# Altium PCB FSK-Modulator-V1.PcbDoc
Units mm, origin at the board's own origin, x right, y up, seen from the top; angles counter-clockwise.
Board outline 52 x 52 mm, 2 copper layers (Top Layer, Bottom Layer); 12 components, 21 nets, 81 pads, 7 vias.
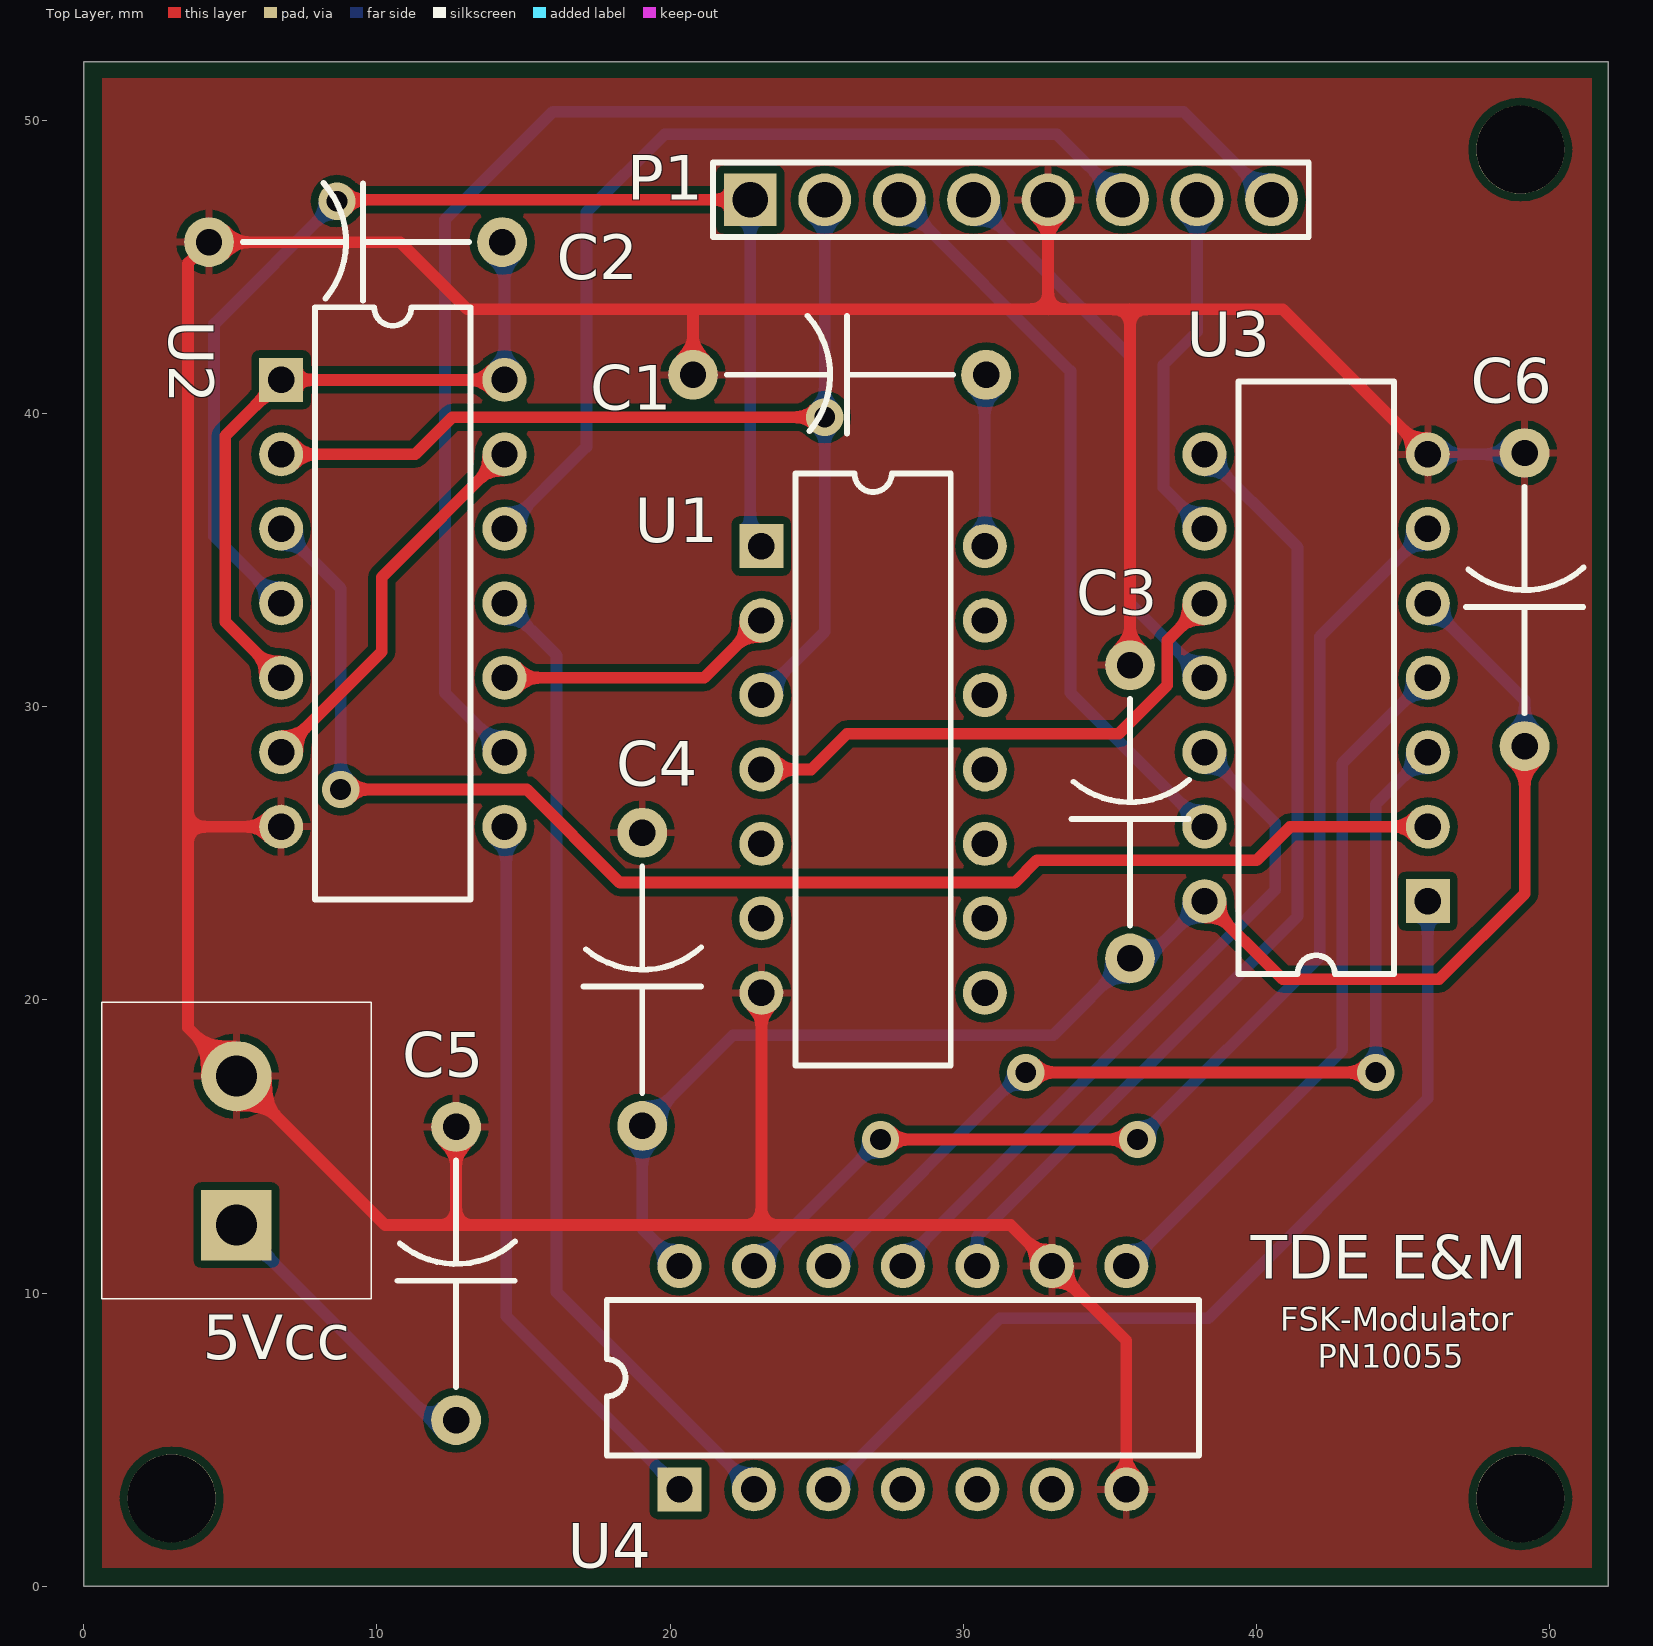
[diagram p0: Top Layer view]
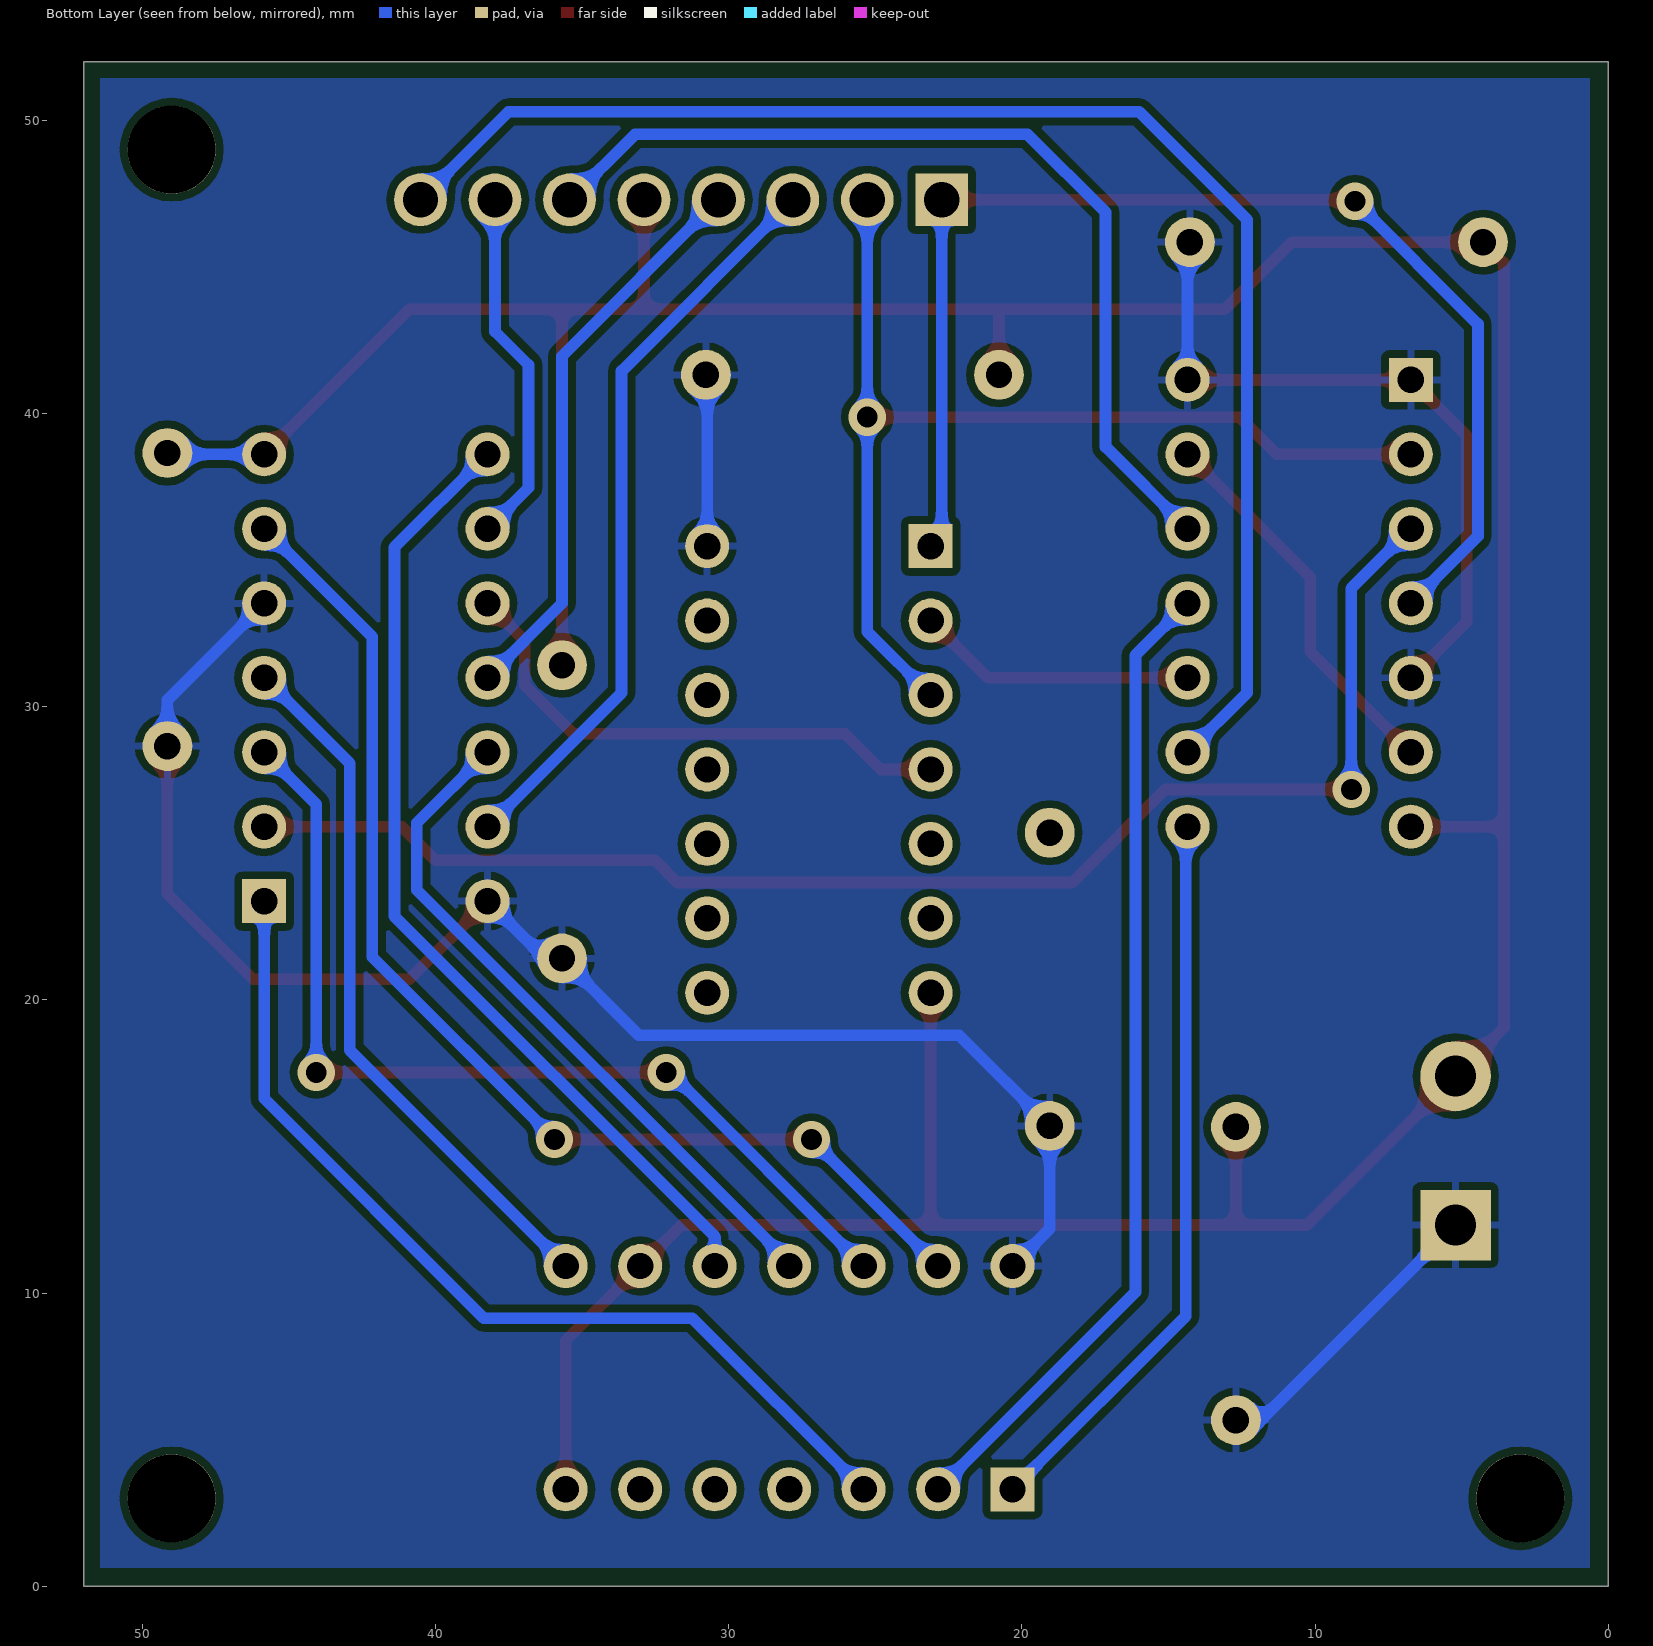
[diagram p1: Bottom Layer view, seen from below]
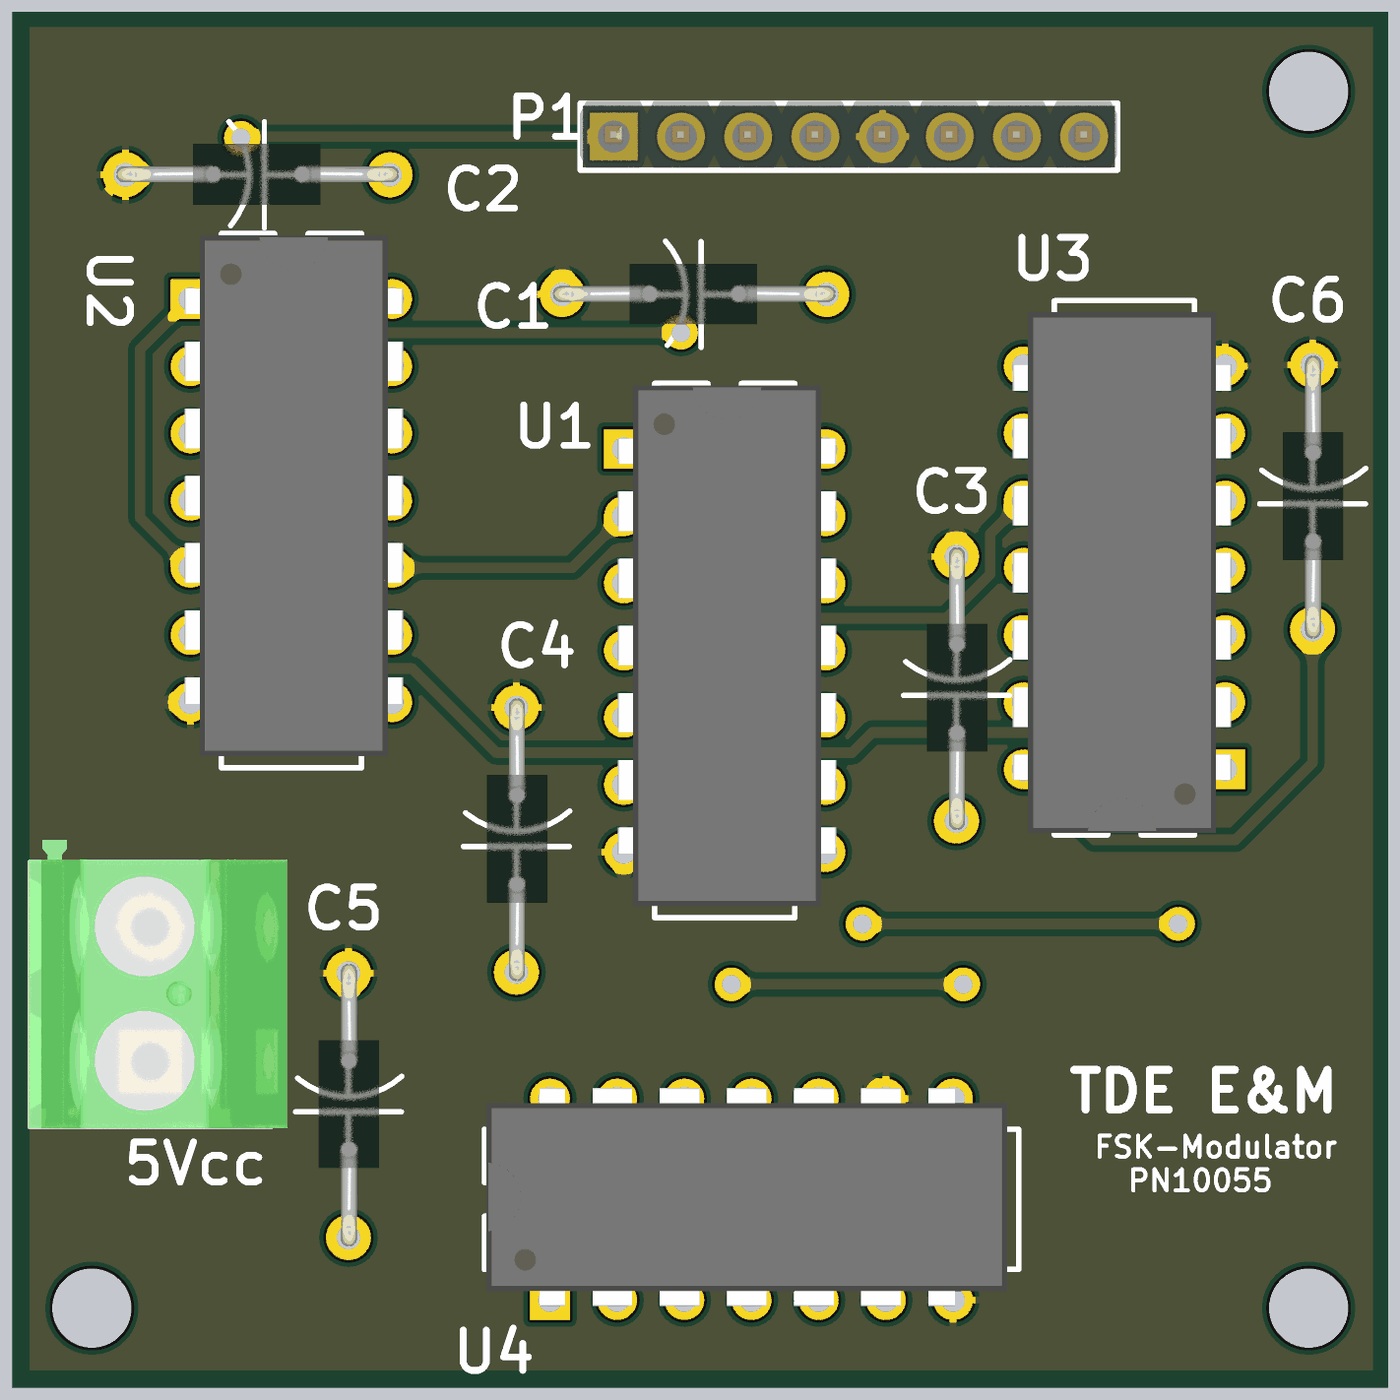
[diagram p2: 3D render of the assembled board from above, using the file's embedded part models]

## Layer stack, top to bottom
Top Solder: solder mask 0.0102, Solder Resist, Dk 3.5
Top Layer: signal copper 0.0356
Dielectric 1: dielectric 0.32, FR-4, Dk 4.8
Bottom Layer: signal copper 0.0356
Bottom Solder: solder mask 0.0102, Solder Resist, Dk 3.5

## Board outline
0,0 0,52 52,52 52,0

## Design rules (kind name [scope] priority, off if disabled: settings)
Clearance Polygons [InPolygon] p1: gap=0.254 ignorepadtopadclearanceinfootprint=FALSE except(0: Arc-Hole Track-Hole SMDPad-Hole THPad-Hole Via-Hole Fill-Hole Poly-Hole Region-Hole Text-Hole)
Clearance [All] p2: gap=0.15 ignorepadtopadclearanceinfootprint=FALSE except(0: Arc-Hole Track-Hole SMDPad-Hole THPad-Hole Via-Hole Fill-Hole Poly-Hole Region-Hole Text-Hole)
MinimumSolderMaskSliver [All] p1: minsoldermaskwidth=0.1
PolygonConnect [All] p1: connectstyle=Relief reliefconductorwidth=0.254 reliefentries=4 polygonreliefangle="90 Angle" airgapwidth=0.254
RoomDefinition FSK-Modulator-V1 [InComponentClass('FSK-Modulator-V1')] p1: confinementstyle=ConfineIn formatcopy=TRUE lockcomponents=FALSE outline -10.414,-7.239 65.659,-7.239 65.659,58.039 -10.414,58.039
RoutingVias [All] p1: holewidth=0.711 width=1.27 viastyle="Through Hole" minholewidth=0 minwidth=0 maxholewidth=0.711 maxwidth=1.27
SilkToSilkClearance [All] p1: silktosilkclearance=0
SilkToSolderMaskClearance [IsPad] p1: minsilkscreentomaskgap=0.1 clearancetoexposedcopper=TRUE
SolderMaskExpansion [All] p1: expansion=0.102
Width [All] p1: maxlimit=4 minlimit=0.254 preferedwidth=0.5
27 further rules are at their usual default settings.

## Components (designator, comment, footprint, x,y, rotation, side; value= is the part's Value field where it differs from the comment)
5Vcc "PHOENIX_1715721" Phoenix-2-5_08 5.207,14.859 r90 top
C1 "Capacitor-Dummy-THT" Dummy-10mm 25.781,41.322 r180 top value=100nF
C2 "Capacitor-Dummy-THT" Dummy-10mm 9.271,45.847 r180 top value=100nF
C3 "Capacitor-Dummy-THT" Dummy-10mm 35.687,26.416 r90 top value=100pF
C4 "Capacitor-Dummy-THT" Dummy-10mm 19.05,20.701 r90 top value=100pF
C5 "Capacitor-Dummy-THT" Dummy-10mm 12.7,10.668 r90 top value=100pF
C6 "Capacitor-Dummy-THT" Dummy-10mm 49.149,33.655 r90 top value=100pF
P1 "Plug_08_2.54" HDR1X8_2.54 31.623,47.291 r0 top
U1 "SN7404N" DIP-14 26.924,27.86 r270 top
U2 "SN74LS08N" DIP-14 10.541,33.528 r270 top
U3 "SN74LS08N" DIP-14 42.037,30.988 r90 top
U4 "SN7432N" DIP-14 27.94,7.112 r0 top

## Footprints (in the part's own frame and the unit in brackets; to place one, negate y for a bottom-side part, rotate by r counter-clockwise, add the part's x,y. Pads: shape width x height; smd on the part's side, far side on the other; paste and mask are expansions set on the pad)
DIP-14 [mm] "DIP; 14 Leads; Row Spacing 7.62 mm; Pitch 2.54 mm"
  rect 1.5x1.5 hole 0.9: 1(-7.62,-3.81)
  round 1.5 hole 0.9: 2(-5.08,-3.81) 3(-2.54,-3.81) 4(0,-3.81) 5(2.54,-3.81) 6(5.08,-3.81) 7(7.62,-3.81) 8(7.62,3.81) 9(5.08,3.81) 10(2.54,3.81) 11(0,3.81) 12(-2.54,3.81) 13(-5.08,3.81) 14(-7.62,3.81)
  silkscreen extent -10.1,-2.65 10.1,2.65, body extent -10.03,-4.04 9.66,4.22, height 4.4
Dummy-10mm [mm] "Dummy-10mm"
  round 1.7 hole 0.9: 1(-5,0) 2(5,0)
  silkscreen extent -3.88,-2.01 3.85,2, body extent -5.34,-1.16 5.35,1.13, height 7.83
HDR1X8_2.54 [mm] "Connector; Header; 8 Position"
  rect 1.8x1.8 hole 1.2: 1(-8.89,0)
  round 1.8 hole 1.2: 2(-6.35,0) 3(-3.81,0) 4(-1.27,0) 5(1.27,0) 6(3.81,0) 7(6.35,0) 8(8.89,0)
  silkscreen extent -10.16,-1.27 10.16,1.27, body extent -10.18,-1.19 10.14,1.35, height 7.27
Phoenix-2-5_08 [mm] "Phoenix, 1715721"
  rect 2.4x2.4 hole 1.4: 1(-2.54,0)
  round 2.4 hole 1.4: 2(2.54,0)
  silkscreen extent -5.06,-4.6 5.06,4.6, body extent -5.05,-5.19 5.85,4.61, height 14.2

## Part data
5Vcc: library part 2Pol_1715721, "Phoenix, 2 pol, 5.08mm, 22A, 715721", Deliverer PartNr=193-0564, Manufacturer=Phoenix, Manufacturer PartNr=1715721, Deliverer=RS, LatestRevisionDate=02.05.2014, LatestRevisionNote="Re-released for DXP Platform.", PackageDescription=Phoenix-2-5_08, Price=0.976/5, Publisher="Sebastian Kulik", TDE-PN=CON0008
C1 C2: Deliverer PartNr=721-5240, Manufacturer=-, Deliverer=RS, Manufacturer PartNr=-, PackageDescription=-, Part Description=Capacitor-Dummy-THT, Price=0.081/50, Published=08.12.2015, Publisher="Sebastian Kulik", TDE-PN=-
C3 C4 C5 C6: Deliverer PartNr=117-344, Manufacturer=-, Deliverer=RS, Manufacturer PartNr=-, PackageDescription=-, Part Description=Capacitor-Dummy-THT, Price=0.09/10, Published=08.12.2015, Publisher="Sebastian Kulik", TDE-PN=-
P1: "Plug, 08-Pin", Deliverer PartNr=61300811121, Manufacturer=WE, Deliverer=WE, LatestRevisionDate=11.11.2014, LatestRevisionNote="Re-released for DXP Platform.", Manufacturer PartNr=61300811121, Publisher="Sebastian Kulik", TDE-PN=CON0035
U1: "Hex Inverter TTL", Deliverer PartNr=305-529, Manufacturer=TI, Deliverer=RS, Manufacturer PartNr=SN7404N, PackageDescription=DIP14, Price=1, Published=24.11.2016, Publisher="Sebastian Kulik", TDE-PN=IC0086
U2 U3: "Quad AND, TTL", Deliverer PartNr=307-519, Manufacturer=TI, Deliverer=RS, Manufacturer PartNr=SN74LS08N, PackageDescription=DIP14, Price=0.56, Published=24.11.2016, Publisher="Sebastian Kulik", TDE-PN=IC0088
U4: "Quad NAND, TTL", Deliverer PartNr=304-093, Manufacturer=TI, Deliverer=RS, Manufacturer PartNr=SN7432N, PackageDescription=DIP14, Price=1.24, Published=24.11.2016, Publisher="Sebastian Kulik", TDE-PN=IC0087

## Free pads (board coordinates)
  round 3 hole 3 unplated: 2(3,3) 3(49,3) 4(49,49)

## Via types
v1: diameter 1.27, hole 0.711, Top Layer to Bottom Layer, 7 vias

## Nets (pads, with @x,y where several pads share a name; then routed paths per layer and width w, separated by ;. In a path a pad name is that pad's centre, name@x,y a point inside that pad or via, vN(x,y) a via of type N, cw(c..) or ccw(c..) an arc to the next point about the centre after c; other vN are vias at no path point)
NetP1_1: P1.1 U1.1 U2.4 | length 42.4
  Top Layer w0.4: v1@8.683,47.291 P1.1
  Bottom Layer w0.4: U2.4 4.445,35.814 4.445,43.053 v1(8.636,47.244) ; P1.1 22.733,35.861 U1.1
NetP1_2: P1.2 U1.3 U2.2 | length 36.9
  Top Layer w0.4: U2.2 11.303,38.608 12.573,39.878 v1(25.273,39.878)
  Bottom Layer w0.4: U1.3 25.273,32.559 25.273,38.608 P1.2
NetP1_3: P1.3 U3.13 | length 25.7
  Bottom Layer w0.4: P1.3 33.655,41.449 33.655,30.48 U3.13
NetP1_4: P1.4 U3.11 | length 19.6
  Bottom Layer w0.4: P1.4 35.687,41.957 35.687,33.528 U3.11
NetP1_6: P1.6 U2.12 | length 32.3
  Bottom Layer w0.4: U2.12 17.145,38.862 17.145,46.863 19.812,49.53 33.194,49.53 P1.6
NetP1_7: P1.7 U3.9 | length 12.3
  Bottom Layer w0.4: P1.7 37.973,42.799 36.83,41.656 36.83,37.465 U3.9
NetP1_8: P1.8 U2.9 | length 50
  Bottom Layer w0.4: U2.9 12.319,30.48 12.319,46.609 16.002,50.292 37.512,50.292 P1.8
NetU1_2: U1.2 U2.10 | length 9.6
  Top Layer w0.4: U2.10 21.162,30.988 U1.2
NetU1_4: U1.4 U3.10 | length 18.4
  Top Layer w0.4: U1.4 24.812,27.86 26.035,29.083 35.306,29.083 36.957,30.734 36.957,32.258 U3.10
NetU2_3: U2.3 U3.2 | length 48.9
  Top Layer w0.4: v1(8.763,27.178) 15.113,27.178 18.288,24.003 31.75,24.003 32.512,24.765 40.005,24.765 41.148,25.908 U3.2
  Bottom Layer w0.4: U2.3 8.763,34.036 v1(8.763,27.178)
NetU2_6: U2.6 U2.13 | length 13.3
  Top Layer w0.4: U2.6 10.16,31.877 10.16,34.417 U2.13
NetU2_8: U2.8 U4.1 | length 25.1
  Bottom Layer w0.4: U2.8 14.408,25.851 14.408,9.214 U4.1
NetU2_11: U2.11 U4.2 | length 33.8
  Bottom Layer w0.4: U2.11 16.129,31.75 16.129,10.033 U4.2
NetU3_1: U3.1 U4.3 | length 32.7
  Bottom Layer w0.4: U4.3 31.242,9.144 38.354,9.144 45.847,16.637 U3.1
NetU3_3: U3.3 U4.12 | length 33.1
  Top Layer w0.4: v1(32.131,17.526) v1(44.069,17.526)
  Bottom Layer w0.4: U4.12 32.004,17.526 v1(32.131,17.526) ; v1(44.069,17.526) 44.069,26.67 U3.3
NetU3_4: U3.4 U4.8 | length 24.3
  Bottom Layer w0.4: U4.8 42.926,18.288 42.926,28.067 U3.4
NetU3_6: U3.6 U4.13 | length 39.8
  Top Layer w0.4: v1(27.178,15.24) v1(35.941,15.24)
  Bottom Layer w0.4: U4.13 v1(27.178,15.24) ; v1(35.941,15.24) 42.164,21.463 42.164,32.385 U3.6
NetU3_8: U3.8 U4.10 | length 33.5
  Bottom Layer w0.4: U4.10 30.48,11.938 41.402,22.86 41.402,35.433 U3.8
NetU3_12: U3.12 U4.11 | length 23.8
  Bottom Layer w0.4: U4.11 27.94,11.049 40.64,23.749 40.64,26.035 U3.12
Vdd: 5Vcc.1 C1.1 C2.1 C3.1 C4.1 C5.1 C6.1 U1.14 U2.1 U2.5 U2.14 U3.5 U3.14 U4.14 | length 92.4
  Top Layer w0.4: U2.5 4.826,32.893 4.826,39.243 U2.1 U2.14 ; U3.14 40.894,20.701 46.228,20.701 49.149,23.622 C6.1
  Bottom Layer w0.4: 5Vcc.1 11.858,5.668 C5.1 ; C2.1 14.351,45.767 U2.14 ; U4.14 19.05,12.192 C4.1 22.145,18.796 33.067,18.796 C3.1 36.275,21.416 U3.14 ; U1.14 30.734,41.275 C1.1 ; U3.5 49.149,30.226 C6.1
Vss: 5Vcc.2 C1.2 C2.2 C3.2 C4.2 C5.2 C6.2 P1.5 U1.7 U2.7 U3.7 U4.7 U4.9 | length 149
  Top Layer w0.4: U2.7 3.556,25.908 ; C5.2 12.7,12.319 ; C1.2 20.781,43.481 ; U1.7 23.114,12.319 ; P1.5 32.893,43.561 ; U4.7 35.56,8.382 U4.9 31.623,12.319 23.114,12.319 ; C3.2 35.687,43.561 ; U3.7 40.894,43.561 35.687,43.561 ; 3.556,25.908 3.556,19.05 5Vcc.2 10.287,12.319 12.7,12.319 ; 3.556,25.908 3.556,45.132 C2.2 10.795,45.847 13.081,43.561 32.893,43.561 ; 12.7,12.319 23.114,12.319 ; 32.893,43.561 35.687,43.561
  Bottom Layer w0.4: U3.7 49.102,38.608 C6.2
pads on no net: U1.5 U1.6 U1.8 U1.9 U1.10 U1.11 U1.12 U1.13 U4.4 U4.5 U4.6

## Polygon pours and split planes (outlines as drawn)
Vdd on Bottom Layer "Vdd-Bottom" (solid, pour order 2): 0.635,0.635 0.635,51.435 51.435,51.435 51.435,0.635
Vss on Top Layer "Vss-top" (solid, pour order 4): 0.635,51.435 0.635,0.635 51.435,0.635 51.435,51.435

## Silkscreen, mask and mechanical layers (free items; w line width, h text height)
Top Overlay:
  text "TDE E&M" at 39.799,10.493 h1.5
  text "FSK-Modulator" at 40.815,8.715 h0.8
  text "PN10055" at 42.085,7.445 h0.8
outline:
  the board outline again, w0.254

## Dimensions
52,0 to 52,52 on Mechanical 16
0,0 to 52,0 on Mechanical 16